# Altium PCB 038.PcbDoc
Units mm, origin at the board's own origin, x right, y up, seen from the top; angles counter-clockwise.
Board outline 137.73 x 65.2 mm, 4 copper layers (Top Layer, Layer 1, Layer 2, Bottom Layer), stack 0.603 mm thick; 34 components, 27 nets, 76 pads, 7 vias.
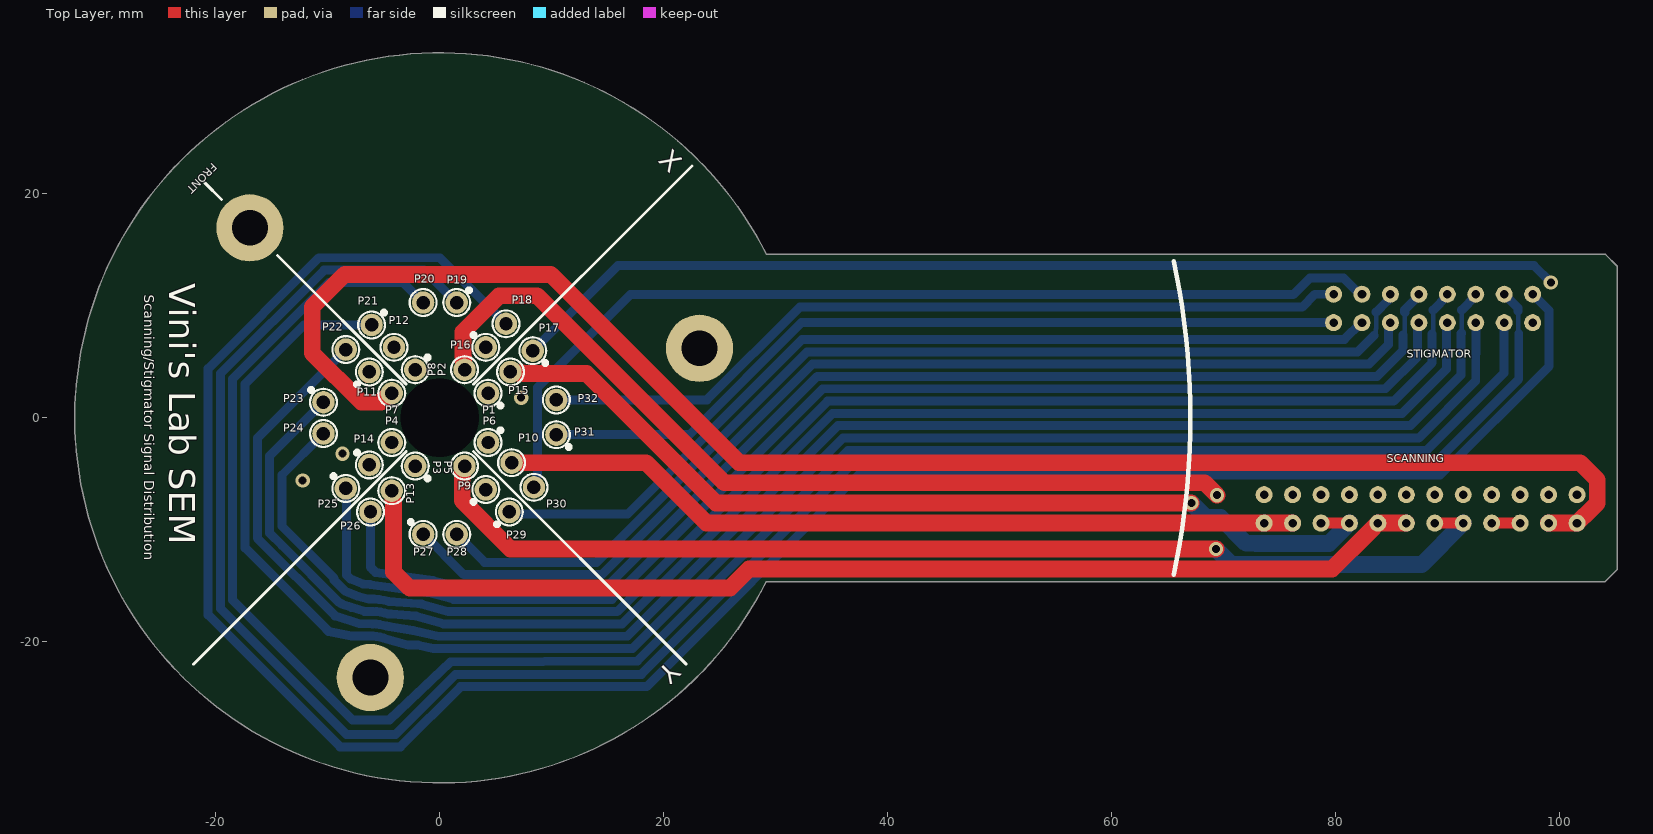
[diagram p0: Top Layer view]
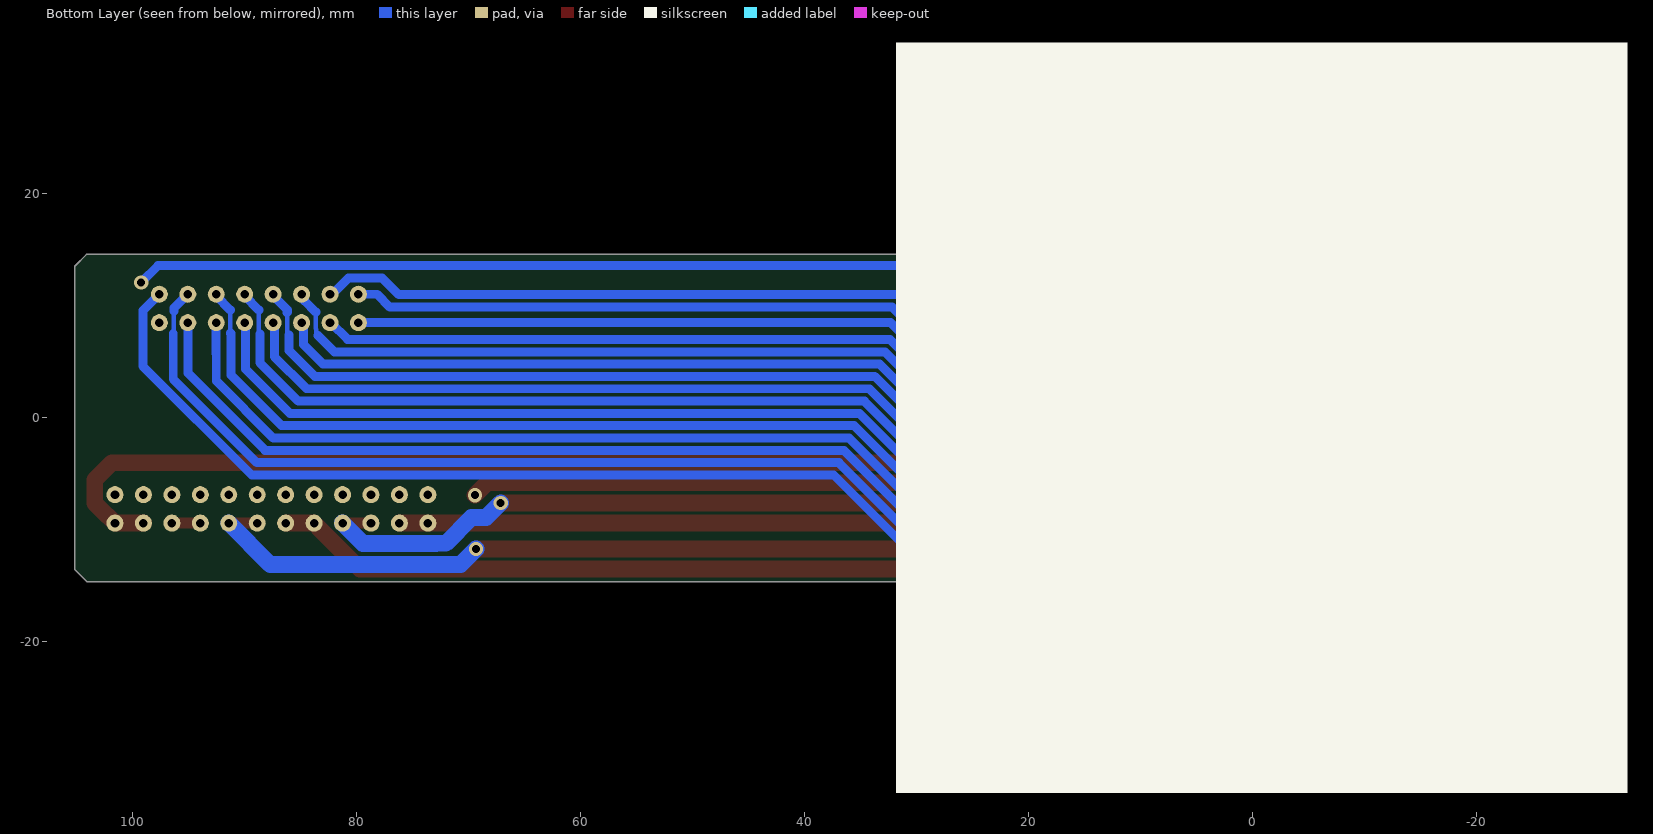
[diagram p1: Bottom Layer view, seen from below]
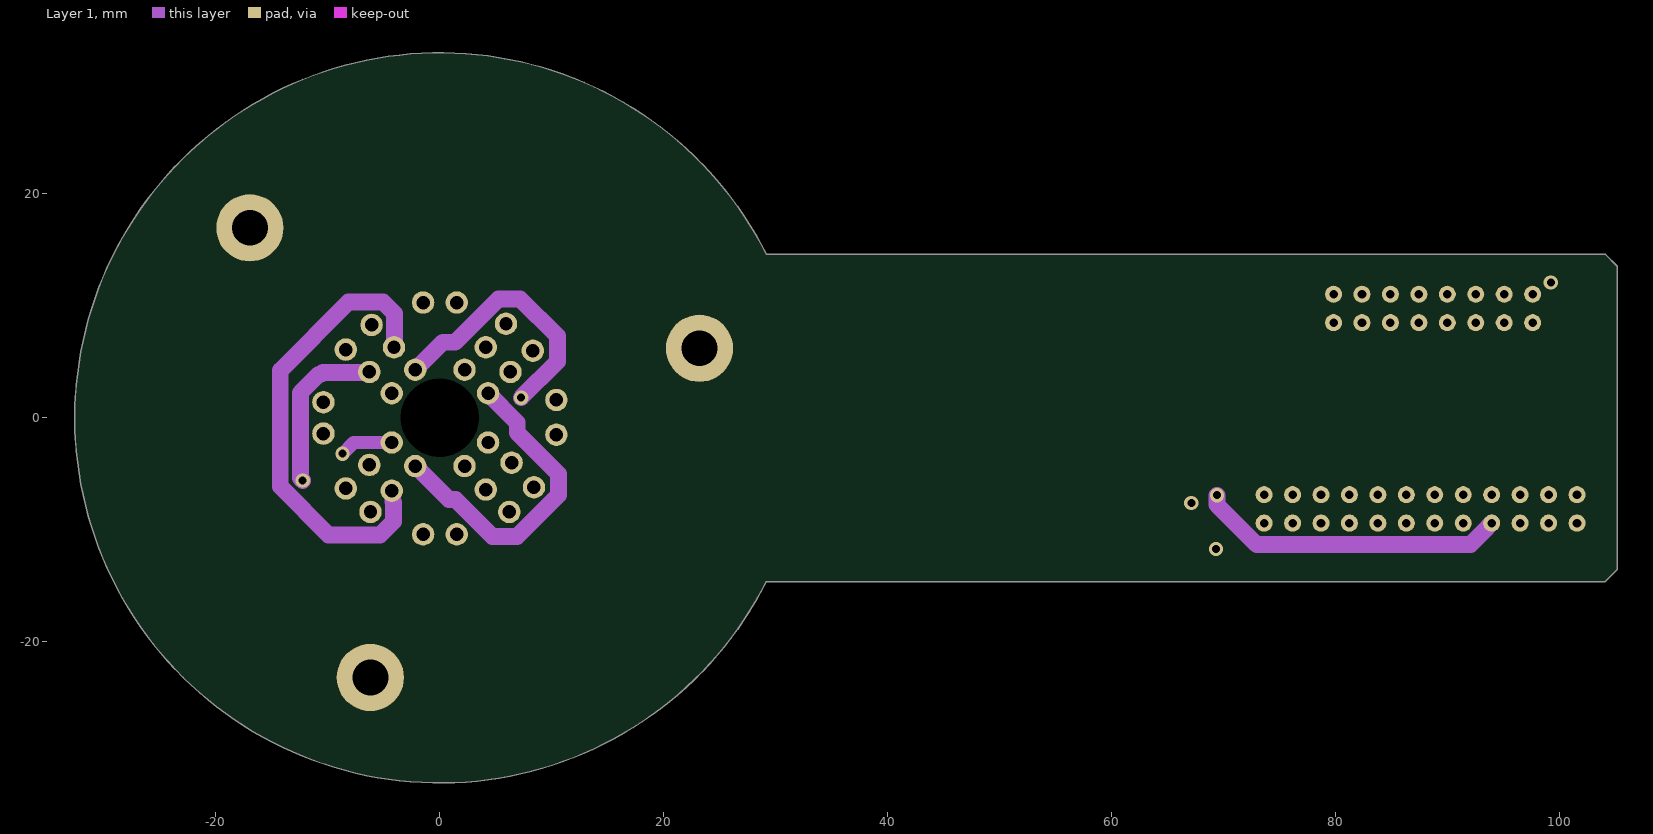
[diagram p2: Layer 1]
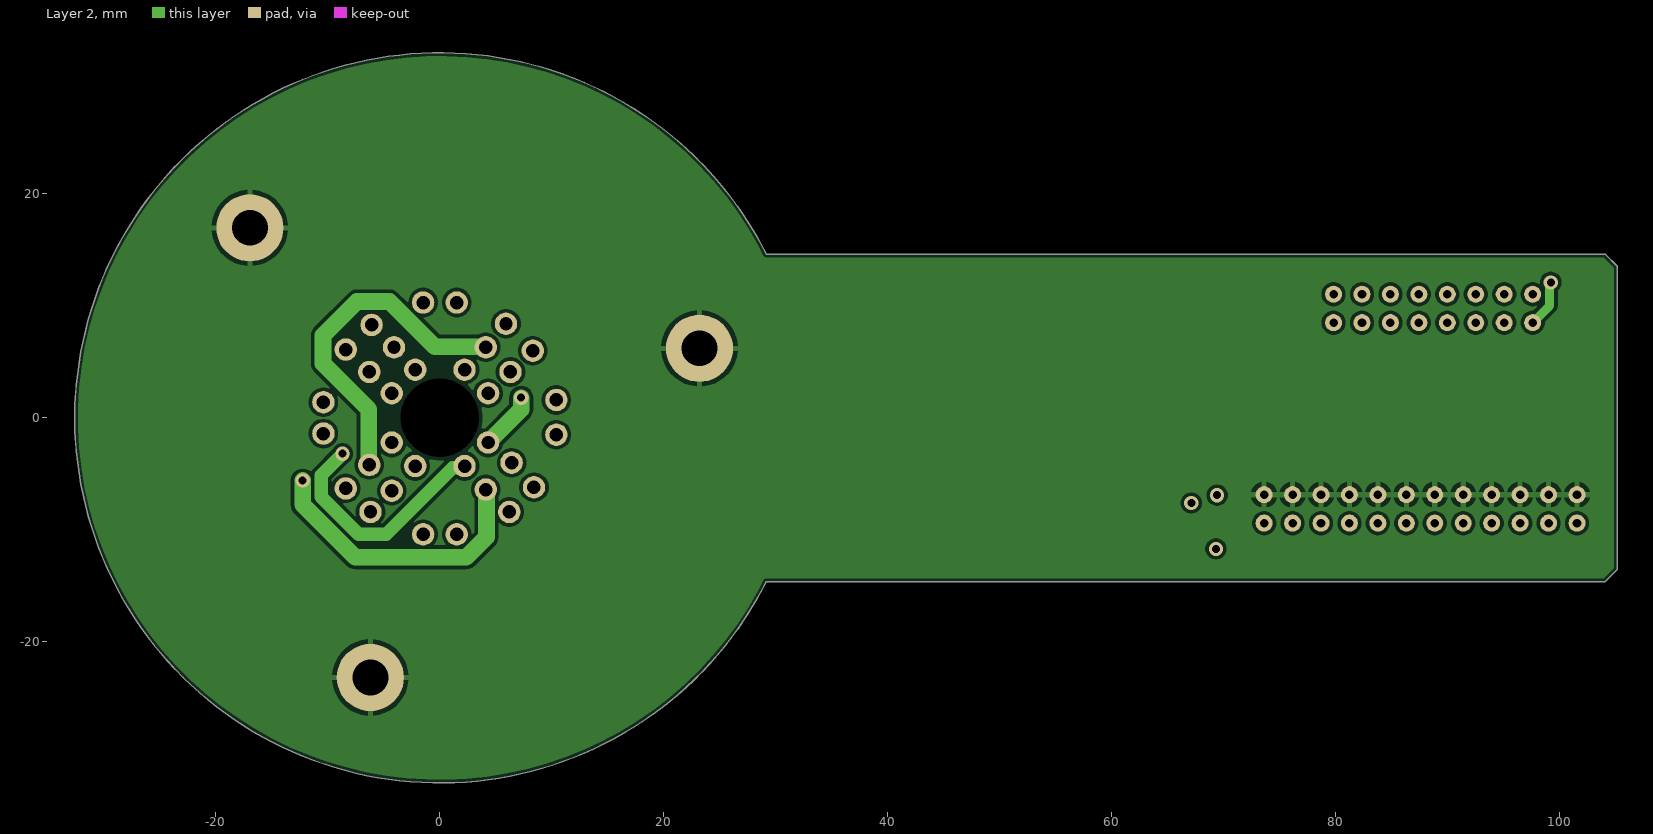
[diagram p3: Layer 2]

## Layer stack, top to bottom
Top Solder: solder mask 0.0102, Solder Resist, Dk 3.5
Top Layer: signal copper 0.0356
Dielectric 2: prepreg 0.0711, PP-006, Dk 4.1
Layer 1: signal copper 0.035
Dielectric 1: dielectric 0.32, FR-4, Dk 4.8
Layer 2: signal copper 0.035
Dielectric 3: prepreg 0.0711, PP-006, Dk 4.1
Bottom Layer: signal copper 0.0356
Bottom Solder: solder mask 0.0102, Solder Resist, Dk 3.5

## Board outline
29.135,-14.627 cw(c0,0) 29.135,14.627 104,14.627 cw(c104,14.5) 104.091,14.59 104.09,14.59 105.09,13.59 cw(c105,13.5) 105.127,13.5 105.127,-13.5 cw(c105,-13.5) 105.09,-13.59 104.09,-14.59 cw(c104,-14.5) 104,-14.627

## Design rules (kind name [scope] priority, off if disabled: settings)
BoardOutlineClearance [All] p1: gap=0.3 ignorepadtopadclearanceinfootprint=FALSE
Clearance [All] p1: gap=0.3 ignorepadtopadclearanceinfootprint=FALSE
ComponentClearance [All] p1: gap=0 collisioncheckmode=3 verticalgap=0.254 showdistances=FALSE
PlaneClearance [All] p1: clearance=1
PlaneConnect [All] p1: planeconnectstyle=Relief reliefexpansion=0.508 reliefentries=4 reliefconductorwidth=0.5 reliefairgap=0.4
PolygonConnect [All] p1: connectstyle=Relief reliefconductorwidth=0.5 reliefentries=4 polygonreliefangle="90 Angle" airgapwidth=0.4
RoutingVias [All] p1: holewidth=0.711 width=1.27 viastyle="Through Hole" minholewidth=0.711 minwidth=1.27 maxholewidth=0.711 maxwidth=1.27
SilkToSilkClearance [All] p1: silktosilkclearance=0
SolderMaskExpansion [All] p1: expansion=0.102 istentingtop=FALSE
Width [All] p1: maxlimit=5 minlimit=0.4 preferedwidth=1
26 further rules are at their usual default settings.

## Components (designator, comment, footprint, x,y, rotation, side; value= is the part's Value field where it differs from the comment)
P1 "PINM" PINM 4.3,2.2 r270 top
P2 "PIN" PIN 2.2,4.3 r0 top
P3 "PINM" PINM -2.2,-4.3 r270 top
P4 "PIN" PIN -4.3,-2.2 r0 top
P5 "PIN" PIN 2.2,-4.3 r0 top
P6 "PINM" PINM 4.3,-2.2 r0 top
P7 "PIN" PIN -4.3,2.2 r270 top
P8 "PINM" PINM -2.2,4.3 r0 top
P9 "PINM" PINM 4.1,-6.4 r180 top
P10 "PIN" PIN 6.4,-4 r0 top
P11 "PINM" PINM -6.3,4.1 r180 top
P12 "PIN" PIN -4.1,6.3 r0 top
P13 "PIN" PIN -4.3,-6.5 r0 top
P14 "PINM" PINM -6.3,-4.2 r90 top
P15 "PIN" PIN 6.3,4.1 r0 top
P16 "PINM" PINM 4.1,6.3 r90 top
P17 "PINM" PINM 8.3,6 r270 top
P18 "PIN" PIN 5.9,8.4 r0 top
P19 "PINM" PINM 1.5,10.3 r0 top
P20 "PIN" PIN -1.5,10.3 r0 top
P21 "PINM" PINM -6.1,8.3 r0 top
P22 "PIN" PIN -8.4,6.1 r0 top
P23 "PINM" PINM -10.4,1.4 r90 top
P24 "PIN" PIN -10.4,-1.4 r0 top
P25 "PINM" PINM -8.4,-6.3 r90 top
P26 "PIN" PIN -6.2,-8.4 r0 top
P27 "PINM" PINM -1.5,-10.4 r90 top
P28 "PIN" PIN 1.5,-10.4 r0 top
P29 "PINM" PINM 6.2,-8.4 r180 top
P30 "PIN" PIN 8.4,-6.2 r0 top
P31 "PINM" PINM 10.4,-1.5 r270 top
P32 "PIN" PIN 10.4,1.6 r0 top
SCANNING "Header-2x12" scanning 73.6,-9.4 r0 top
STIGMATOR "Header-2x8" STIGMATOR 97.58,11.04 r180 top

## Footprints (in the part's own frame and the unit in brackets; to place one, negate y for a bottom-side part, rotate by r counter-clockwise, add the part's x,y. Pads: shape width x height; smd on the part's side, far side on the other; paste and mask are expansions set on the pad)
PIN [mm]
  round 2 hole 1.2: 1(0,0)
  silkscreen extent -1.2,-1.2 1.2,1.2
PINM [mm]
  round 2 hole 1.2: 1(0,0)
  silkscreen extent -1.2,-1.2 1.2,1.2
scanning [mil]
  round 60 hole 30: 1(0,0) 2(0,100) 3(100,0) 4(100,100) 5(200,0) 6(200,100) 7(300,0) 8(300,100) 9(400,0) 10(400,100) 11(500,0) 12(500,100) 13(600,0) 14(600,100) 15(700,0) 16(700,100) 17(800,0) 18(800,100) 19(900,0) 20(900,100) 21(1000,0) 22(1000,100) 23(1100,0) 24(1100,100)
STIGMATOR [mil]
  round 60 hole 30: 1(0,0) 2(0,100) 3(100,100) 4(100,0) 5(200,0) 6(200,100) 7(300,0) 8(300,100) 9(400,0) 10(400,100) 11(500,0) 12(500,100) 13(600,0) 14(600,100) 15(700,0) 16(700,100)

## Free pads (board coordinates)
  round 1.524 hole 7 unplated: 1(0,0)
  round 6 hole 3.2: ""(-16.971,16.971) ""(-6.212,-23.182) ""(23.182,6.212)

## Via types
v1: diameter 1.27, hole 0.711, Top Layer to Bottom Layer, 7 vias

## Nets (pads, with @x,y where several pads share a name; then routed paths per layer and width w, separated by ;. In a path a pad name is that pad's centre, name@x,y a point inside that pad or via, vN(x,y) a via of type N, cw(c..) or ccw(c..) an arc to the next point about the centre after c; other vN are vias at no path point)
GND: pad. SCANNING.2 SCANNING.4 SCANNING.6 SCANNING.8 SCANNING.10 SCANNING.12 SCANNING.14 SCANNING.16 SCANNING.18 SCANNING.20 SCANNING.22 SCANNING.24
NetP1_1: P1.1 P3.1 | length 28.7
  Layer 1 w1.5: P3.1 0.8,-7.3 1.4,-7.3 4.7,-10.6 6.899,-10.6 10.6,-6.899 10.6,-5 6.9,-1.3 6.9,-0.4 P1.1
NetP2_1: P2.1 SCANNING.17 SCANNING.19 | length 109.7
  Top Layer w1: SCANNING.17 SCANNING.19
  Top Layer w1.5: P2.1 2.104,4.396 2.104,5.397 2.05,5.451 2.05,7.672 5.278,10.9 8.7,10.9 25.4,-5.8 68.3,-5.8 v1(69.4,-6.9)
  Layer 1 w1.5: v1(69.4,-6.9) 69.4,-7.763 72.937,-11.3 92.043,-11.3 93.192,-10.151 93.192,-10.134 93.92,-9.406 SCANNING.17
NetP4_1: P4.1 P5.1 SCANNING.13 SCANNING.15 | length 125.3
  Top Layer w1: SCANNING.13 SCANNING.15
  Top Layer w1.5: P5.1 2.104,-4.396 2.104,-4.749 2,-4.854 2,-7.4 6.3,-11.7 v1(69.3,-11.7)
  Layer 1 w1: P5.1@2.064,-4.3 P5.1
  Layer 1 w1.2: v1(-8.7,-3.2) -8.681,-3.2 -7.681,-2.2 P4.1
  Layer 2 w1.2: v1@-8.677,-3.196 -10.6,-5.119 -10.6,-7.067 -7.267,-10.4 -4.8,-10.4 1.147,-4.453 2.047,-4.453 P5.1
  Bottom Layer w1.5: v1(69.3,-11.7) 70.7,-13.1 87.68,-13.1 SCANNING.15
NetP6_1: P6.1 P8.1 | length 28.8
  Layer 1 w1.5: P8.1 0.248,6.748 1.348,6.748 3.7,9.1 5.229,10.628 7.172,10.628 10.5,7.3 10.5,5.044 v1(7.256,1.8)
  Layer 2 w1.5: P6.1 7.256,0.756 v1(7.256,1.8)
NetP7_1: P7.1 SCANNING.21 SCANNING.23 | length 144.1
  Top Layer w1.5: P7.1 -4.435,2.2 -5.235,1.4 -7,1.4 -11.4,5.8 -11.4,9.9 -8.5,12.8 9.9,12.8 26.7,-4 101.8,-4 103.352,-5.552 103.352,-7.611 102.291,-8.672 102.274,-8.672 101.546,-9.4 SCANNING.21
NetP9_1: P9.1 P11.1 | length 40.5
  Top Layer w1.5: P11.1@-6.396,3.869 P11.1@-6.396,4.004
  Layer 1 w1.5: v1(-12.25,-5.59) -12.45,-5.39 -12.45,2.249 -10.799,3.9 -10.6,3.9 -10.45,4.05 -6.35,4.05 P11.1
  Layer 2 w1.5: v1(-12.25,-5.59) -12.25,-7.75 -7.55,-12.45 2.349,-12.45 4.15,-10.649 4.15,-6.45 P9.1
NetP10_1: P10.1 SCANNING.1 SCANNING.3 | length 72
  Top Layer w1.5: P10.1 18.4,-4 23.8,-9.4 SCANNING.1 SCANNING.3
NetP12_1: P12.1 P13.1 SCANNING.9 SCANNING.11 | length 142.6
  Top Layer w1.5: P13.1 -4.204,-6.596 -4.204,-7.497 -4.15,-7.551 -4.15,-13.75 -2.7,-15.2 25.9,-15.2 27.6,-13.5 79.683,-13.5 83.032,-10.151 83.032,-10.134 83.76,-9.406 SCANNING.9 SCANNING.11
  Layer 1 w1.5: P13.1 -4.204,-6.596 -4.204,-7.497 -4.15,-7.551 -4.15,-9.249 -5.351,-10.45 -9.935,-10.45 -14.25,-6.135 -14.25,4.25 -8.15,10.35 -5.079,10.35 -4.05,9.321 -4.05,6.35 P12.1
NetP14_1: P14.1 P16.1 | length 30.8
  Layer 2 w1.5: P14.1 -6.35,-4.15 -6.35,0.75 -10.45,4.85 -10.45,7.35 -7.4,10.4 -4.5,10.4 -0.45,6.35 4.05,6.35 P16.1
NetP15_1: P15.1 SCANNING.5 SCANNING.7 | length 84.6
  Top Layer w1: SCANNING.5 SCANNING.7
  Top Layer w1.5: P15.1 6.396,4.004 7.397,4.004 7.451,3.95 13.104,3.95 24.654,-7.6 v1(67.1,-7.6)
  Bottom Layer w1.5: v1(67.1,-7.6) 68.4,-8.9 69.7,-8.9 72,-11.2 72.837,-11.2 72.849,-11.212 79.408,-11.212 SCANNING.7
NetP17_1: P17.1 STIGMATOR.2 | length 98.9
  Layer 2 w0.8: STIGMATOR.2 99.1,10.02 v1@99.1,12.1
  Bottom Layer w0.8: P17.1 15.9,13.6 78.737,13.6 78.739,13.602 80.861,13.602 80.863,13.6 97.7,13.6 v1(99.2,12.1)
NetP18_1: P18.1 STIGMATOR.1 | length 200.9
  Bottom Layer w0.8: P18.1 0,14.3 -10.8,14.3 -20.7,4.4 -20.7,-17.6 -8.918,-29.382 -3.526,-29.382 1.856,-24 18.456,-24 37.356,-5.1 89.325,-5.1 99.042,4.617 99.042,9.578 STIGMATOR.1
NetP19_1: P19.1 STIGMATOR.4 | length 189
  Bottom Layer w0.4: 96.287,9.555 96.305,9.537 96.305,7.585 96.34,7.55
  Bottom Layer w0.8: P19.1 -1.4,13.2 -10.344,13.2 -19.6,3.944 -19.6,-17.006 -8.324,-28.282 -3.982,-28.282 1.4,-22.9 18,-22.9 36.9,-4 88.869,-4 96.34,3.471 96.34,7.55 ; STIGMATOR.4 96.287,9.793 96.287,9.555
NetP20_1: P20.1 STIGMATOR.3 | length 176.3
  Bottom Layer w0.8: P20.1 -3.3,12.1 -9.889,12.1 -18.5,3.489 -18.5,-16.268 -7.786,-26.982 -4.852,-26.982 -4.52,-26.982 0.944,-21.8 17.644,-21.7 36.444,-2.9 88.131,-2.9 95.04,4.009 STIGMATOR.3
NetP21_1: P21.1 STIGMATOR.6 | length 156.4
  Bottom Layer w0.8: P21.1 -12.133,8.3 -17.4,3.033 -17.4,-11.6 -10.12,-18.88 -9.928,-19.072 -7.91,-19.483 -6.308,-19.483 cw(c-6.212,-23.182) -5.041,-19.672 -2.811,-20.3 -1.933,-20.3 -0.591,-20.6 17.189,-20.6 35.989,-1.8 87.392,-1.8 92.5,3.308 92.5,5.738 92.517,5.755 92.517,8.258 92.5,8.275 STIGMATOR.6
NetP22_1: P22.1 STIGMATOR.5 | length 148.1
  Bottom Layer w0.4: 91.217,7.565 91.23,7.578 91.23,9.628
  Bottom Layer w0.8: P22.1 -16.3,-1.8 -16.3,-10.743 -9.364,-17.679 -7.192,-18.383 -6.333,-18.383 -6.321,-18.383 cw(c-6.212,-23.182) -4.782,-18.6 -4.565,-18.636 -2.404,-18.989 -0.136,-19.5 16.733,-19.5 35.533,-0.7 86.654,-0.7 91.2,3.846 91.2,7.531 91.217,7.548 91.217,7.565 ; 91.23,9.628 92.5,10.898 STIGMATOR.5
NetP23_1: P23.1 STIGMATOR.8 | length 135.2
  Bottom Layer w0.8: P23.1 -15.2,-3.4 -15.2,-10.288 -14.1,-11.388 -9.041,-16.447 -8.731,-16.639 -7.899,-16.92 -6.737,-17.283 -6.333,-17.283 cw(c-6.212,-23.182) -4.623,-17.5 -4.432,-17.51 -4.366,-17.52 -2.118,-17.698 0.32,-18.4 16.277,-18.4 35.077,0.4 85.915,0.4 89.9,4.385 89.9,8.44 STIGMATOR.8
NetP24_1: P24.1 STIGMATOR.7 | length 131.2
  Bottom Layer w0.4: 88.69,7.477 88.6,7.477 88.69,7.567 88.69,9.628
  Bottom Layer w0.8: P24.1 -14.1,-5.1 -14.1,-9.673 -9.446,-14.327 -9.446,-14.487 -8.453,-15.479 -7.334,-15.929 -6.337,-16.183 cw(c-6.212,-23.182) -4.569,-16.378 -1.962,-16.598 -1.627,-16.633 0.776,-17.3 15.822,-17.3 34.622,1.5 85.177,1.5 88.6,4.923 88.6,7.477 ; 88.69,9.628 89.96,10.898 STIGMATOR.7
NetP25_1: P25.1 STIGMATOR.10 | length 115.8
  Bottom Layer w0.8: P25.1 -8.346,-6.354 -8.346,-14.031 -8.111,-14.265 -7.996,-14.38 -6.874,-14.834 -6.221,-14.897 -1.124,-15.58 1.231,-16.2 15.366,-16.2 34.166,2.6 84.438,2.6 87.3,5.462 87.3,8.015 87.32,8.035 87.32,8.4 STIGMATOR.10
NetP26_1: P26.1 STIGMATOR.9 | length 111.8
  Bottom Layer w0.4: 86,7.411 86.158,7.569 86.158,9.023 86.162,9.027 86.162,9.427
  Bottom Layer w0.8: P26.1 -6.2,-13.331 -5.966,-13.566 -5.731,-13.8 -0.982,-14.48 -0.61,-14.539 1.687,-15.1 14.911,-15.1 33.711,3.7 83.7,3.7 86,6 86,7.411 ; 86.162,9.427 86.15,9.439 86.15,9.65 87.42,10.92 STIGMATOR.9
NetP27_1: P27.1 STIGMATOR.12 | length 98.2
  Bottom Layer w0.8: P27.1 -1.457,-10.4 2.143,-14 14.455,-14 33.255,4.8 82.962,4.8 84.7,6.538 84.7,7.95 84.78,8.029 84.78,8.4 STIGMATOR.12
NetP28_1: P28.1 STIGMATOR.11 | length 95.6
  Bottom Layer w0.4: 83.4,7.352 83.549,7.501 83.549,7.924 83.602,7.977 83.602,9.431 83.61,9.439
  Bottom Layer w0.8: P28.1 4,-12.9 13.999,-12.9 32.799,5.9 81.949,5.9 82.987,6.938 82.987,6.939 83.4,7.352 ; 83.61,9.439 84.618,10.447 84.618,10.636 84.88,10.898 STIGMATOR.11
NetP29_1: P29.1 STIGMATOR.14 | length 83.3
  Bottom Layer w0.8: P29.1 6.391,-8.591 16.752,-8.591 32.344,7 80.765,7 82.265,8.5 STIGMATOR.14
NetP30_1: P30.1 STIGMATOR.13 | length 87.3
  Bottom Layer w0.8: P30.1 8.63,-5.97 8.63,-5.202 8.7,-5.131 8.7,2.7 17,11 76.2,11 77.7,12.5 79.192,12.5 79.194,12.502 80.682,12.502 82.144,11.04 STIGMATOR.13
NetP31_1: P31.1 STIGMATOR.16 | length 73.5
  Bottom Layer w0.8: P31.1 22.288,-1.5 32.288,8.5 STIGMATOR.16
NetP32_1: P32.1 STIGMATOR.15 | length 73.3
  Bottom Layer w0.8: P32.1 23.832,1.6 32.132,9.9 77,9.9 78.14,11.04 STIGMATOR.15

## Polygon pours and split planes (outlines as drawn)
GND on Layer 2 "GND_L03_P000" (solid, remove dead copper, pour order 0): 33,16 15,34 -15,34 -34,15 -34,-15 -15,-34 15,-34 33,-16 107,-16 107,16

## Silkscreen, mask and mechanical layers (free items; w line width, h text height)
Top Overlay:
  lines w0.254: -22,-22 -3,-3 ; -21,21 -19.5,19.5 ; -14.5,14.5 -3,3 ; 3,-3 22,-22 ; 3,3 22.5,22.5
  lines w0.4: 65.52,-14.004 ccw(c0,0) 65.52,14.004
  text "FRONT" at -20.491,22.991 h1.2 r225
  text "X" at 19,22.5 h3 r315
  text "Vini's Lab SEM" at -24.957,12 h4 r270
  text "Scanning/Stigmator Signal Distribution" at -26.713,11 h1.52 r270
  text "Y" at 20,-21.25 h3 r225
Bottom Overlay:
  rectangle: -33.5,-33.5 31.8,33.5
Mechanical 1:
  circle w0.2: c0,0 r24.021
  circle w0.2: c0,0 r12
  lines w0.2: 29.069,-14.534 cw(c0,0) 29.069,14.534
  lines w0.254: 29,14.5 104,14.5 105,13.5 105,-13.5 104,-14.5 29.069,-14.5